# Altium PCB djb_v2_flex_ASCII.PcbDoc
Units mm, origin at the board's own origin, x right, y up, seen from the top; angles counter-clockwise.
Board outline 31.95 x 6.55 mm, 2 copper layers (Top Layer, Bottom Layer), stack 0.051 mm thick; 5 components, 6 nets, 19 pads, 0 vias.
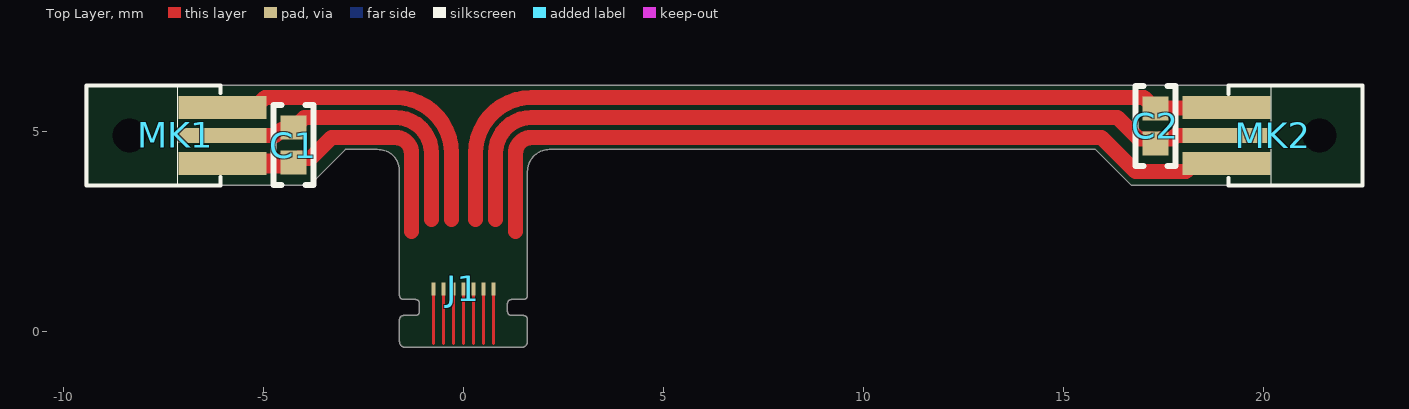
[diagram p0: Top Layer view]
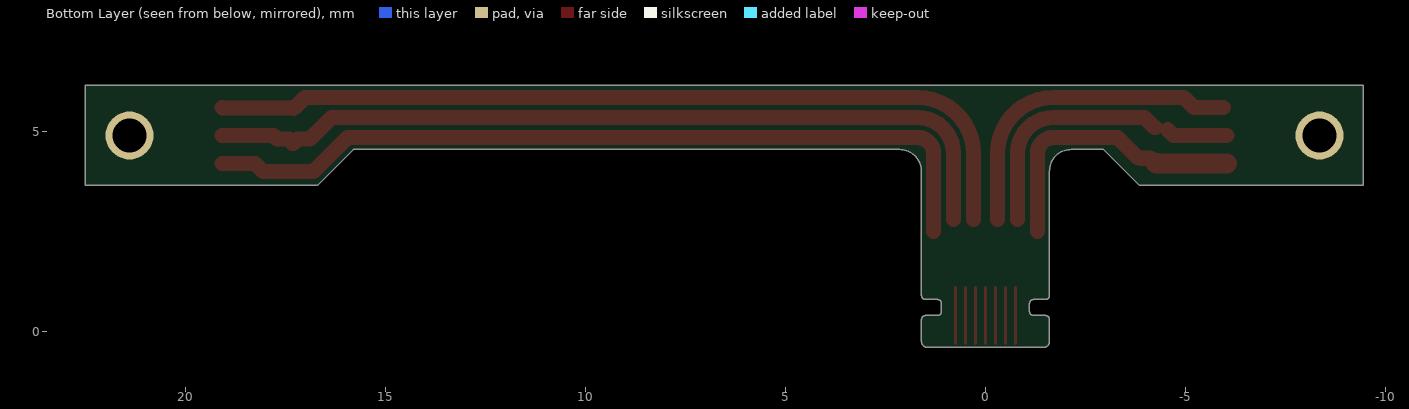
[diagram p1: Bottom Layer view, seen from below]

## Layer stack, top to bottom
Top Solder: solder mask 0.012, Solder Resist, Dk 3.4
Top Layer: signal copper 0.0203
Dielectric 1: dielectric 0.0102, Polysomething, Dk 3.4
Bottom Layer: signal copper 0.0203
Bottom Solder: solder mask 0.012, Solder Resist, Dk 3.4

## Board outline
1.5,0.4 cw(c1.5,0.3) 1.6,0.3 1.6,-0.25 cw(c1.45,-0.25) 1.45,-0.4 -1.45,-0.4 cw(c-1.45,-0.25) -1.6,-0.25 -1.6,0.3 cw(c-1.5,0.3) -1.5,0.4 -1.2,0.4 ccw(c-1.2,0.5) -1.1,0.5 -1.1,0.7 ccw(c-1.2,0.7) -1.2,0.8 -1.5,0.8 cw(c-1.5,0.9) -1.6,0.9 -1.6,4 ccw(c-2.133,4.017) -2.15,4.55 -2.95,4.55 -3.85,3.65 -9.45,3.65 -9.45,6.15 22.5,6.15 22.5,3.65 16.7,3.65 15.8,4.55 2.15,4.55 ccw(c2.15,4) 1.6,4 1.6,0.9 cw(c1.5,0.9) 1.5,0.8 1.2,0.8 ccw(c1.2,0.7) 1.1,0.7 1.1,0.5 ccw(c1.2,0.5) 1.2,0.4

## Design rules (kind name [scope] priority, off if disabled: settings)
AssemblyTestPointUsage [All] p0: scope1count=1 scope1_0_kind=Board scope1_0_value=Board scope2count=1 scope2_0_kind=Board scope2_0_value=Board commentlength=0
AssemblyTestpoint [All] p0: scope1count=1 scope1_0_kind=Board scope1_0_value=Board scope2count=1 scope2_0_kind=Board scope2_0_value=Board commentlength=0
BoardOutlineClearance BoardOutlineClearance_FFC [All] p0: scope1count=1 scope1_0_kind=Component scope1_0_value=J1 scope2count=1 scope2_0_kind=Board scope2_0_value=Board commentlength=0 gap=0
BoardOutlineClearance BoardOutlineClearance_Silk [All] p0 off: scope1count=1 scope1_0_kind=Board scope1_0_value=Board scope2count=1 scope2_0_kind=Board scope2_0_value=Board commentlength=90 gap=0 // Protel DXP Scope 1 Expression Was: OnLayer('Top Overlay') Or OnLayer('Bottom Overlay')
BoardOutlineClearance BoardOutlineClearance_Normal [All] p0: scope1count=1 scope1_0_kind=Board scope1_0_value=Board scope2count=1 scope2_0_kind=Board scope2_0_value=Board commentlength=0 gap=0.099
BoardOutlineClearance BoardOutlineClearance_Silk [OnLayer('Top Overlay') Or OnLayer('Bottom Overlay')] p1: gap=0 ignorepadtopadclearanceinfootprint=FALSE
BoardOutlineClearance BoardOutlineClearance_FFC [InComponent('J1')] p2: gap=0 ignorepadtopadclearanceinfootprint=FALSE
BoardOutlineClearance BoardOutlineClearance_Normal [All] p3: gap=0.099 ignorepadtopadclearanceinfootprint=FALSE except(0: Arc-SplitBarrior Arc-SplitContinuation Track-SplitBarrior Track-SplitContinuation SMDPad-SplitBarrior SMDPad-SplitContinuation THPad-SplitBarrior THPad-SplitContinuation Via-SplitBarrior Via-SplitContinuation Fill-SplitBarrior Fill-SplitContinuation Poly-SplitBarrior Poly-SplitContinuation Region-SplitBarrior Region-SplitContinuation Text-SplitBarrior Text-SplitContinuation)
Clearance Clearance_SameNet [All] p0: scope1count=1 scope1_0_kind=Board scope1_0_value=Board scope2count=1 scope2_0_kind=Board scope2_0_value=Board commentlength=0 gap=0.07
Clearance [All] p0: scope1count=1 scope1_0_kind=Board scope1_0_value=Board scope2count=1 scope2_0_kind=Board scope2_0_value=Board commentlength=0 gap=0.07
Clearance Clearance_SameNet [All] p1: gap=0.07 ignorepadtopadclearanceinfootprint=FALSE except(-1000: Arc-Via Track-Via SMDPad-Via THPad-Via Via-Via)
Clearance [All] p2: gap=0.07 ignorepadtopadclearanceinfootprint=FALSE
ComponentClearance [All] p0: scope1count=1 scope1_0_kind=Board scope1_0_value=Board scope2count=1 scope2_0_kind=Board scope2_0_value=Board commentlength=0 gap=0 collisioncheckmode=3
ComponentClearance [All] p1: gap=0 collisioncheckmode=3 verticalgap=0 showdistances=FALSE
DiffPairsRouting [All] p0: scope1count=1 scope1_0_kind=Board scope1_0_value=Board scope2count=1 scope2_0_kind=Board scope2_0_value=Board commentlength=0
FabricationTestPointUsage [All] p0: scope1count=1 scope1_0_kind=Board scope1_0_value=Board scope2count=1 scope2_0_kind=Board scope2_0_value=Board commentlength=0 valid=0 allowmultiple=FALSE
FabricationTestpoint [All] p0: scope1count=1 scope1_0_kind=Board scope1_0_value=Board scope2count=1 scope2_0_kind=Board scope2_0_value=Board commentlength=0 side=3 testpointundercomponent=TRUE minsize=1.016 maxsize=2.54 preferedsize=1.524 minholesize=0 maxholesize=1.016 preferedholesize=0.813 testpointgrid=0.025
FanoutControl Fanout_Default [All] p0: scope1count=1 scope1_0_kind=Board scope1_0_value=Board scope2count=1 scope2_0_kind=Board scope2_0_value=Board commentlength=30 // Fanout_Default (Default Rule)
FanoutControl Fanout_Small [All] p0 off: scope1count=1 scope1_0_kind=Board scope1_0_value=Board scope2count=1 scope2_0_kind=Board scope2_0_value=Board commentlength=84 // Protel DXP Scope 1 Expression Was: (CompPinCount < 5)   Fanout_Small (Default Rule)
FanoutControl Fanout_SOIC [All] p0 off: scope1count=1 scope1_0_kind=Board scope1_0_value=Board scope2count=1 scope2_0_kind=Board scope2_0_value=Board commentlength=71 // Protel DXP Scope 1 Expression Was: IsSOIC   Fanout_SOIC (Default Rule)
FanoutControl Fanout_LCC [All] p0 off: scope1count=1 scope1_0_kind=Board scope1_0_value=Board scope2count=1 scope2_0_kind=Board scope2_0_value=Board commentlength=69 // Protel DXP Scope 1 Expression Was: IsLCC   Fanout_LCC (Default Rule)
FanoutControl Fanout_BGA [All] p0 off: scope1count=1 scope1_0_kind=Board scope1_0_value=Board scope2count=1 scope2_0_kind=Board scope2_0_value=Board commentlength=69 // Protel DXP Scope 1 Expression Was: IsBGA   Fanout_BGA (Default Rule)
Height [All] p0: scope1count=1 scope1_0_kind=Board scope1_0_value=Board scope2count=1 scope2_0_kind=Board scope2_0_value=Board commentlength=0
HoleSize [All] p0: scope1count=1 scope1_0_kind=Board scope1_0_value=Board scope2count=1 scope2_0_kind=Board scope2_0_value=Board commentlength=0 absolutevalues=TRUE maxlimit=2.54 minlimit=0.025 maxpercent=80.000 minpercent=20.000
HoleToHoleClearance [All] p0: scope1count=1 scope1_0_kind=Board scope1_0_value=Board scope2count=1 scope2_0_kind=Board scope2_0_value=Board commentlength=0
LayerPairs [All] p0: scope1count=1 scope1_0_kind=Board scope1_0_value=Board scope2count=1 scope2_0_kind=Board scope2_0_value=Board commentlength=0 enforce=TRUE
MinimumSolderMaskSliver [All] p0: scope1count=1 scope1_0_kind=Board scope1_0_value=Board scope2count=1 scope2_0_kind=Board scope2_0_value=Board commentlength=0
MinimumSolderMaskSliver [All] p1: minsoldermaskwidth=0.076
NetAntennae [All] p0: scope1count=1 scope1_0_kind=Board scope1_0_value=Board scope2count=1 scope2_0_kind=Board scope2_0_value=Board commentlength=0
PasteMaskExpansion [All] p0: scope1count=1 scope1_0_kind=Board scope1_0_value=Board scope2count=1 scope2_0_kind=Board scope2_0_value=Board commentlength=0 expansion=0
PlaneClearance [All] p0: scope1count=1 scope1_0_kind=Board scope1_0_value=Board scope2count=1 scope2_0_kind=Board scope2_0_value=Board commentlength=0 clearance=0.508
PlaneConnect [All] p0: scope1count=1 scope1_0_kind=Board scope1_0_value=Board scope2count=1 scope2_0_kind=Board scope2_0_value=Board commentlength=0 planeconnectstyle=Relief reliefexpansion=0.508 reliefentries=4 reliefconductorwidth=0.254 reliefairgap=0.254
PolygonConnect [All] p0: scope1count=1 scope1_0_kind=Board scope1_0_value=Board scope2count=1 scope2_0_kind=Board scope2_0_value=Board commentlength=0 connectstyle=Relief reliefconductorwidth=0.254 reliefentries=4 polygonreliefangle="90 Angle"
PolygonConnect [All] p1: connectstyle=Relief reliefconductorwidth=0.254 reliefentries=4 polygonreliefangle="90 Angle" airgapwidth=0.254
RoutingCorners [All] p0: scope1count=1 scope1_0_kind=Board scope1_0_value=Board scope2count=1 scope2_0_kind=Board scope2_0_value=Board commentlength=0 cornerstyle=45-Degree minsetback=2.54 maxsetback=2.54
RoutingLayers [All] p0: scope1count=1 scope1_0_kind=Board scope1_0_value=Board scope2count=1 scope2_0_kind=Board scope2_0_value=Board commentlength=0 top layer=Automatic bottom layer=Automatic
RoutingPriority [All] p0: scope1count=1 scope1_0_kind=Board scope1_0_value=Board scope2count=1 scope2_0_kind=Board scope2_0_value=Board commentlength=0
RoutingTopology [All] p0: scope1count=1 scope1_0_kind=Board scope1_0_value=Board scope2count=1 scope2_0_kind=Board scope2_0_value=Board commentlength=0 topology=Shortest
RoutingVias [All] p0: scope1count=1 scope1_0_kind=Board scope1_0_value=Board scope2count=1 scope2_0_kind=Board scope2_0_value=Board commentlength=0 holewidth=0.152 width=0.305 viastyle="Through Hole" minholewidth=0.152 minwidth=0.305 maxholewidth=2.032 maxwidth=2.54
RoutingVias [All] p1: holewidth=0.152 width=0.305 viastyle="Through Hole" minholewidth=0.152 minwidth=0.305 maxholewidth=2.032 maxwidth=2.54
ShortCircuit [All] p0: scope1count=1 scope1_0_kind=Board scope1_0_value=Board scope2count=1 scope2_0_kind=Board scope2_0_value=Board commentlength=0 allowed=FALSE
SilkToBoardRegionClearance [All] p0: scope1count=1 scope1_0_kind=Board scope1_0_value=Board scope2count=1 scope2_0_kind=Board scope2_0_value=Board commentlength=0
SilkToSilkClearance [All] p0: scope1count=1 scope1_0_kind=Board scope1_0_value=Board scope2count=1 scope2_0_kind=Board scope2_0_value=Board commentlength=0
SilkToSilkClearance [All] p1: silktosilkclearance=-25.4
SilkToSolderMaskClearance [All] p0 off: scope1count=1 scope1_0_kind=Board scope1_0_value=Board scope2count=1 scope2_0_kind=Board scope2_0_value=Board commentlength=44 // Protel DXP Scope 1 Expression Was: IsPad
SilkToSolderMaskClearance [IsPad] p1: minsilkscreentomaskgap=-25.4 clearancetoexposedcopper=TRUE
SolderMaskExpansion [All] p0: scope1count=1 scope1_0_kind=Board scope1_0_value=Board scope2count=1 scope2_0_kind=Board scope2_0_value=Board commentlength=0 expansion=0.076
SolderMaskExpansion [All] p1: expansion=0.076
UnRoutedNet [All] p0: scope1count=1 scope1_0_kind=Board scope1_0_value=Board scope2count=1 scope2_0_kind=Board scope2_0_value=Board commentlength=0
UnpouredPolygon [All] p0: scope1count=1 scope1_0_kind=Board scope1_0_value=Board scope2count=1 scope2_0_kind=Board scope2_0_value=Board commentlength=0
ViasUnderSMD [All] p0: scope1count=1 scope1_0_kind=Board scope1_0_value=Board scope2count=1 scope2_0_kind=Board scope2_0_value=Board commentlength=0 allowed=FALSE
ViasUnderSMD [All] p1: allowed=FALSE
Width [All] p0: scope1count=1 scope1_0_kind=Board scope1_0_value=Board scope2count=1 scope2_0_kind=Board scope2_0_value=Board commentlength=0 maxlimit=2.54 minlimit=0.07 preferedwidth=0.152
Width [All] p1: maxlimit=2.54 minlimit=0.07 preferedwidth=0.152 minimp=50.000000 maximp=50.000000 favimp=50.000000
26 further rules are at their usual default settings.

## Components (designator, comment, footprint, x,y, rotation, side; value= is the part's Value field where it differs from the comment)
C1 "10uF" "CAP 0402/1005" -4.25,4.66 r90 top
C2 "10uF" "CAP 0402/1005" 17.3,5.14 r270 top
J1 "FFC EDGE BOTTOM" HIROSE_FH58M-7S-0.25SHW-99_BOTTOMFFC 0,-0.4 r180 top locked
MK1 "MEMS" MIC_CAGRI -8.35,4.9 r90 top
MK2 "" MIC_CAGRI 21.4,4.9 r270 top

## Footprints (in the part's own frame and the unit in brackets; to place one, negate y for a bottom-side part, rotate by r counter-clockwise, add the part's x,y. Pads: shape width x height; smd on the part's side, far side on the other; paste and mask are expansions set on the pad)
"CAP 0402/1005" [mm] "Chip Capacitor, 2-Leads, Body 1.02x0.51mm, IPC Medium Density"
  rect 0.6x0.64 smd: 1(-0.44,0) 2(0.44,0)
  silkscreen extent -1,-0.5 1,0.5
HIROSE_FH58M-7S-0.25SHW-99_BOTTOMFFC [mm] "Hirose FH58M-7S-0.25SHW(99) FFC Pattern for Bottom Contacts"
  rect 0.1x0.33 smd paste-1000 mask+0: 1(-0.75,-1.465) 2(-0.5,-1.465) 3(-0.25,-1.465) 4(0,-1.465) 5(0.25,-1.465) 6(0.5,-1.465) 7(0.75,-1.465)
  Top Layer lines w0.07: 0.75,-0.1 0.75,-1.465 0.75,-1.5 ; 0.5,-0.1 0.5,-1.465 0.5,-1.5 ; 0.25,-0.1 0.25,-1.465 0.25,-1.5 ; 0,-0.1 0,-1.5 ; -0.25,-0.1 -0.25,-1.465 -0.25,-1.5 ; -0.5,-0.1 -0.5,-1.465 -0.5,-1.5 ; -0.75,-0.1 -0.75,-1.465 -0.75,-1.5
MIC_CAGRI [mm] "MQM-32325-000, O8XC03"
  rect 0.57x2.2 smd mask+0: 1(0.7,-2.32) 3(-0.7,-2.32)
  rect 0.381x2.2 smd mask+0: 2(0,-2.32)
  round 0 / inner round 1.2 / far side round 1.2 hole 0.85 unplated paste-0.7: RING(0,0)
  silkscreen extent -1.27,-2.27 1.25,1.08

## Part data
C1 C2: library part C1005X5R0J106M050BC, "CAP CER 10UF 6.3V X5R 0402"
J1: library part HIROSE_FH58M-7S-0.25SHW-99_BOTTOM, "Bottom FFC Land Pattern for Hirose FH58M-7S-0.25SHW(99) 7-pin Top+Bottom Contact FFC Connector"
MK1 MK2: library part Mems_Mic_Cagri, "Generic 3-pin bottom mount MEMS mic, with Cagri extended footprint"

## Nets (pads, with @x,y where several pads share a name; then routed paths per layer and width w, separated by ;. In a path a pad name is that pad's centre, name@x,y a point inside that pad or via, vN(x,y) a via of type N, cw(c..) or ccw(c..) an arc to the next point about the centre after c; other vN are vias at no path point)
+MEMS1: C1.1 J1.7 MK1.3 | length 7.2
  Top Layer w0.381: C1.1@-4.25,4.2 C1.1@-4.244,4.206 ; C1.1 ccw(c-4.23,4.22) C1.1@-4.244,4.206 ; C1.1@-4.23,4.2 cw(c-4.23,4.22) C1.1@-4.244,4.206 ; -1.3,2.5 -1.3,4.45 ccw(c-1.7,4.45) -1.7,4.85 -3.3,4.85 -3.8,4.35 -3.85,4.35 -3.871,4.329 -4.121,4.329 C1.1@-4.244,4.206
  Top Layer w0.508: MK1.3 -4.27,4.2 C1.1
+MEMS2: C2.1 J1.3 MK2.3 | length 21.5
  Top Layer w0.381: 0.3,2.8 0.3,4.45 cw(c1.7,4.45) 1.7,5.85 17.01,5.85 17.26,5.6 C2.1@17.28,5.6 ; C2.1@17.31,5.6 C2.1@17.28,5.6 ; C2.1@17.35,5.6 C2.1@17.28,5.6 ; MK2.3 19.07,5.59 17.31,5.59 C2.1 ccw(c17.28,5.58) C2.1@17.28,5.6
GND1: C1.2 J1.6 MK1.2 | length 7.3
  Top Layer w0.381: MK1.2 -4.7,4.9 C1.2@-4.55,5.05 ; C1.2 -4.23,5.1 -3.98,5.35 -1.7,5.35 cw(c-1.7,4.45) -0.8,4.45 -0.8,2.8
GND2: C2.2 J1.2 MK2.2 | length 20.8
  Top Layer w0.381: 0.8,2.8 0.8,4.45 cw(c1.7,4.45) 1.7,5.35 16.35,5.35 16.89,4.81 17.191,4.81 C2.2 ; C2.2@17.32,4.7 C2.2 ; MK2.2 17.8,4.9 17.709,4.81 17.41,4.81 C2.2
MIC1: J1.5 MK1.1 | length 8.2
  Top Layer w0.381: MK1.1@-5.95,5.6 -5.215,5.6 -4.965,5.85 -1.7,5.85 cw(c-1.7,4.45) -0.3,4.45 -0.3,2.8
MIC2: J1.1 MK2.1 | length 20.4
  Top Layer w0.381: 1.3,2.5 1.3,4.45 cw(c1.7,4.45) 1.7,4.85 15.95,4.85 16.8,4 18.065,4 18.265,4.2 MK2.1
pads on no net: J1.4 MK1.RING MK2.RING

## Silkscreen, mask and mechanical layers (free items; w line width, h text height)
Mechanical 3:
  lines w0.076: -9.45,3.65 -9.45,6.15 22.5,6.15 22.5,3.65 16.7,3.65 15.8,4.55 2.15,4.55 ccw(c2.15,4) 1.6,4 1.6,2.23 1.6,0.9 cw(c1.5,0.9) 1.5,0.8 1.2,0.8 ccw(c1.2,0.7) 1.1,0.7 1.1,0.5 ccw(c1.2,0.5) 1.2,0.4 1.5,0.4 cw(c1.5,0.3) 1.6,0.3 1.6,-0.25 cw(c1.45,-0.25) 1.45,-0.4 -1.45,-0.4 cw(c-1.45,-0.25) -1.6,-0.25 -1.6,0.3 cw(c-1.5,0.3) -1.5,0.4 -1.2,0.4 ccw(c-1.2,0.5) -1.1,0.5 -1.1,0.7 ccw(c-1.2,0.7) -1.2,0.8 -1.5,0.8 cw(c-1.5,0.9) -1.6,0.9 -1.6,2.25 -1.6,4 ccw(c-2.15,4) -2.15,4.55 -2.95,4.55 -3.85,3.65 -9.45,3.65
Mechanical 5 (Mech5):
  lines w0.076: -1.6,-0.25 ccw(c-1.45,-0.25) -1.45,-0.4 1.45,-0.4 ccw(c1.45,-0.25) 1.6,-0.25 1.6,0.3 ccw(c1.5,0.3) 1.5,0.4 1.2,0.4 cw(c1.2,0.5) 1.1,0.5 1.1,0.7 cw(c1.2,0.7) 1.2,0.8 1.5,0.8 ccw(c1.5,0.9) 1.6,0.9 1.6,2.23 -1.6,2.23 -1.6,0.9 ccw(c-1.5,0.9) -1.5,0.8 -1.2,0.8 cw(c-1.2,0.7) -1.1,0.7 -1.1,0.5 cw(c-1.2,0.5) -1.2,0.4 -1.5,0.4 ccw(c-1.5,0.3) -1.6,0.3 -1.6,-0.25

## Text inside footprints (layer, text, board x,y; h text height)
MK2: Mechanical 1 "MEMS" at 20.6,1.154 h1.52